# Altium PCB DiffProbe.PcbDoc
Units mm, origin at the board's own origin, x right, y up, seen from the top; angles counter-clockwise.
Board outline 23.11 x 12 mm, 4 copper layers (L1, L2, L3, L4), stack 1.627 mm thick; 27 components, 18 nets, 79 pads, 31 vias.
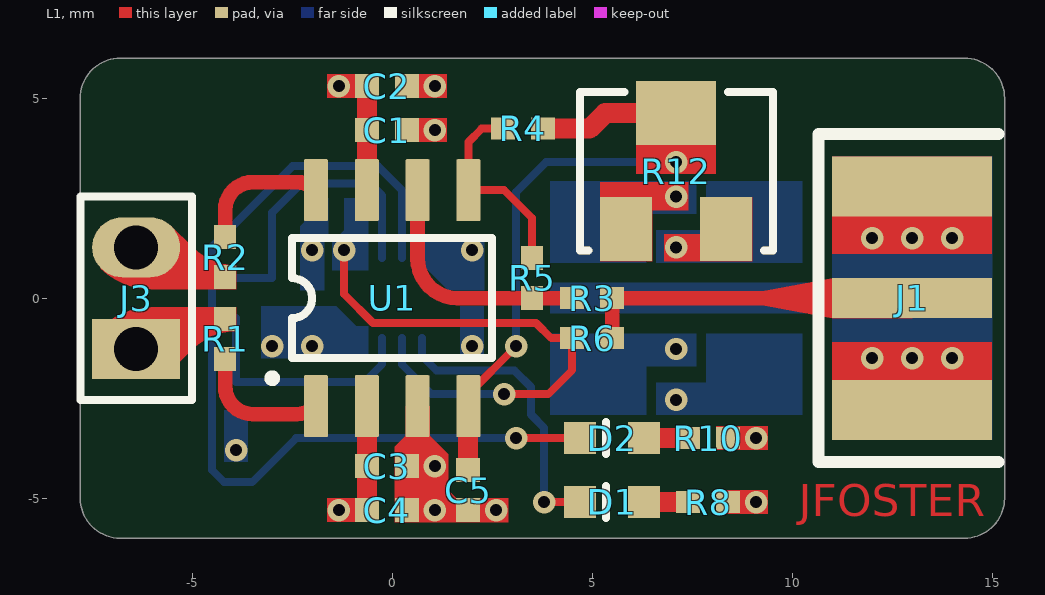
[diagram p0: L1 view]
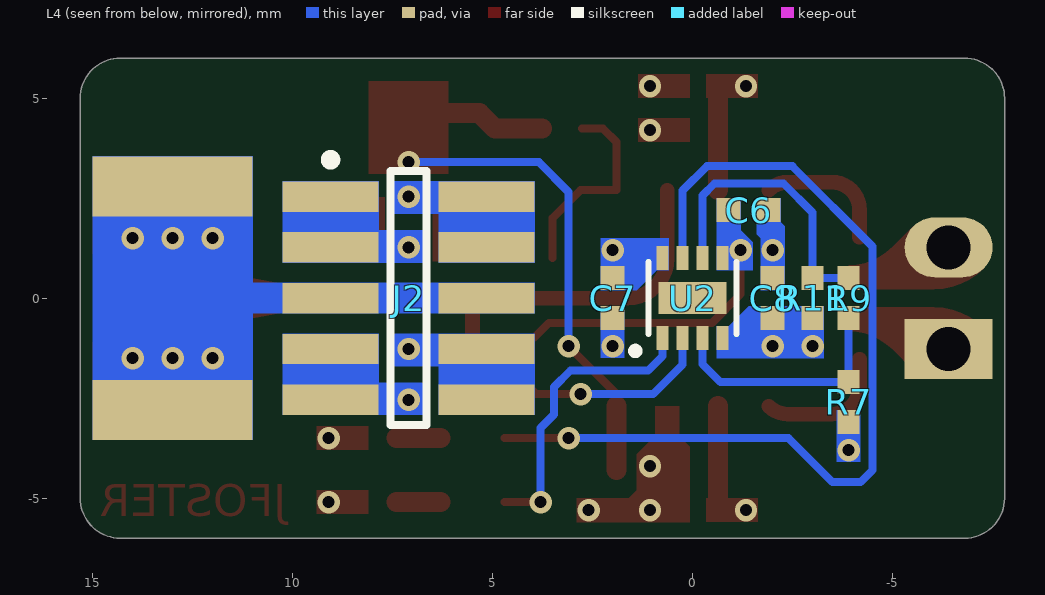
[diagram p1: L4 view, seen from below]
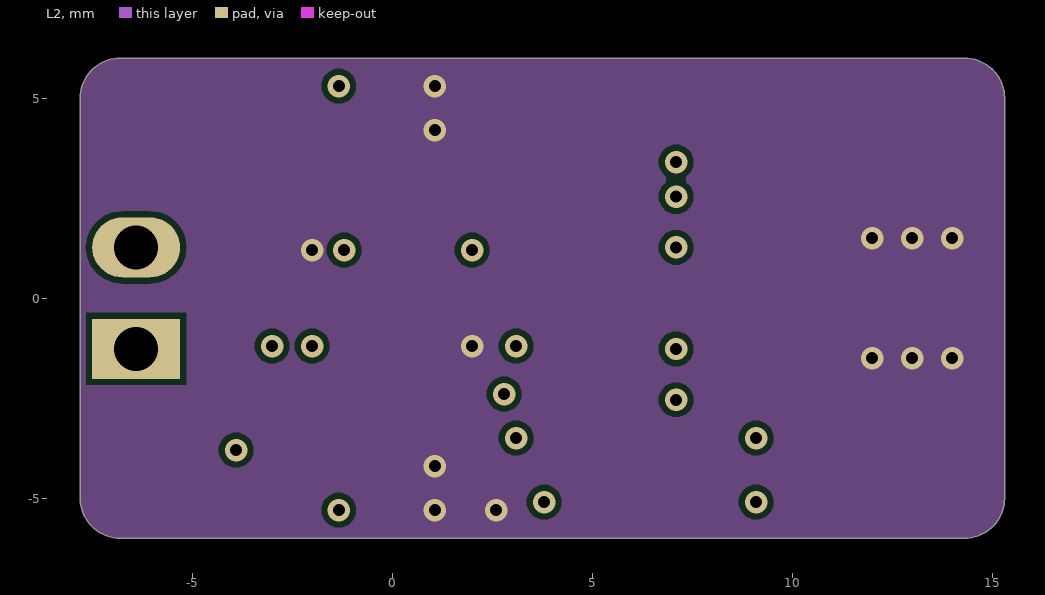
[diagram p2: L2]
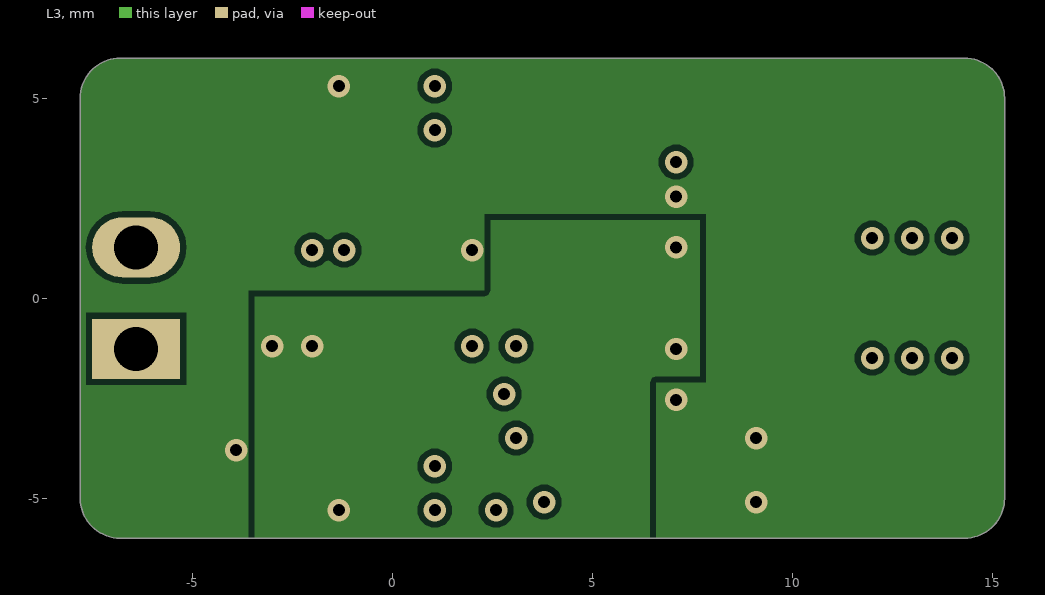
[diagram p3: L3]
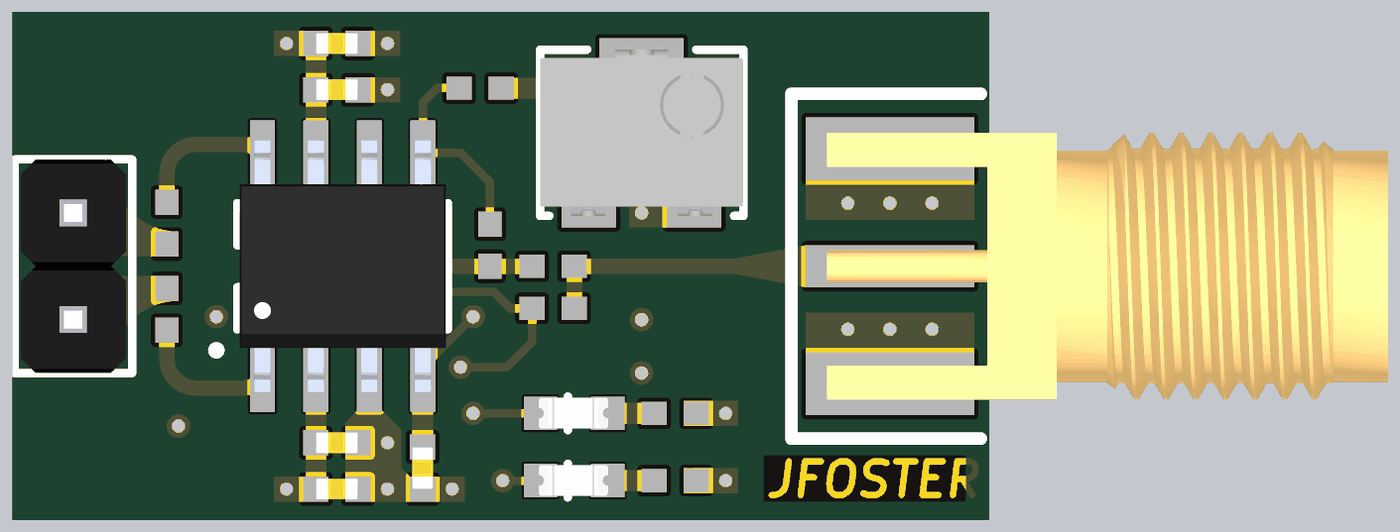
[diagram p4: 3D render of the assembled board from above, using the file's embedded part models]
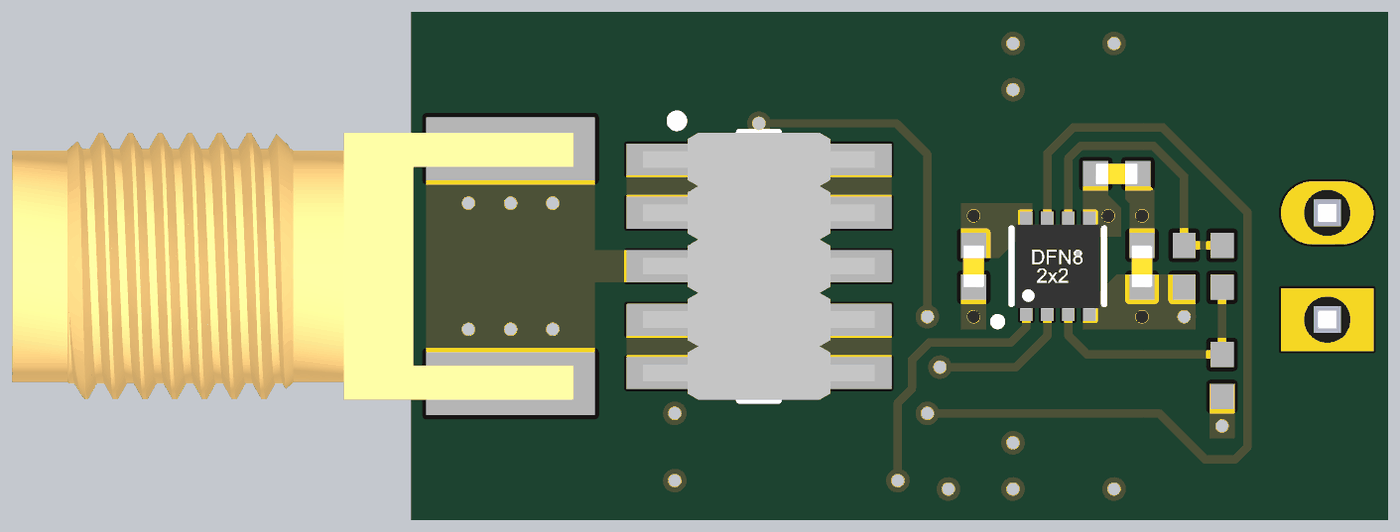
[diagram p5: 3D render of the assembled board from below, using the file's embedded part models]

## Layer stack, top to bottom
Top Solder: solder mask 0.0102, Solder Resist, Dk 3.5
L1: signal copper 0.035
D12: prepreg 0.2104, 7628*1, Dk 4.4
L2: signal copper 0.0356
D23: dielectric 1.065, FR-4, Dk 4.05
L3: signal copper 0.0356
D34: prepreg 0.2104, 7628*1, Dk 4.4
L4: signal copper 0.035
Bottom Solder: solder mask 0.0102, Solder Resist, Dk 3.5

## Board outline
-7.8,-5 -7.8,5 cw(c-6.8,5) -6.8,6 14.31,6 cw(c14.31,5) 15.31,5 15.31,-5 cw(c14.31,-5) 14.31,-6 -6.8,-6 cw(c-6.8,-5)

## Design rules (kind name [scope] priority, off if disabled: settings)
Clearance [All] p1: gap=0.15 ignorepadtopadclearanceinfootprint=FALSE except(0: Arc-Hole Track-Hole SMDPad-Hole THPad-Hole Via-Hole Fill-Hole Poly-Hole Region-Hole Text-Hole)
MinimumSolderMaskSliver [All] p1: minsoldermaskwidth=0
PolygonConnect [All] p1: thpad.connectstyle=Relief thpad.reliefconductorwidth=0.254 thpad.reliefentries=4 thpad.polygonreliefangle="90 Angle" thpad.airgapwidth=0.254 smdpad.connectstyle=Relief smdpad.reliefconductorwidth=0.254 smdpad.reliefentries=4 smdpad.polygonreliefangle="90 Angle" smdpad.airgapwidth=0.254 via.connectstyle=Direct via.reliefconductorwidth=0.254 via.reliefentries=4 via.polygonreliefangle="90 Angle" via.airgapwidth=0.254
RoutingVias [All] p1: holewidth=0.3 width=0.56 viastyle="Through Hole" minholewidth=0.3 minwidth=0.56 maxholewidth=0.3 maxwidth=0.56
SilkToSolderMaskClearance [IsPad] p1: minsilkscreentomaskgap=0 clearancetoexposedcopper=TRUE
SolderMaskExpansion SolderMaskExpansion_Via [IsVia] p1: expansion=0.102 istentingtop=TRUE
SolderMaskExpansion [All] p2: expansion=0.102 istentingtop=FALSE
Width Width_S50 [InNetClass('S50')] p1: maxlimit=0.369 minlimit=0.369 preferedwidth=0.369 toplayer_maxwidth=0.369 bottomlayer_maxwidth=0.369 impedanceprofiledriven=TRUE impedanceprofileid={E52D7031-FA7C-42DA-A5D1-F1E983051976} impedanceprofilevalue=50.000000 minimp=50.000000 maximp=50.000000 favimp=50.000000
Width [All] p2: maxlimit=2 minlimit=0.15 preferedwidth=0.2
28 further rules are at their usual default settings.

## Classes and differential pairs
net class S50: NetJ1_1 NetJ3_1 NetJ3_2 NetR1_2 NetR2_2 NetR3_1

## Components (designator, comment, footprint, x,y, rotation, side; value= is the part's Value field where it differs from the comment)
C1 "100pF" CAP,SMD,0402 -0.135,4.2 r180 top
C2 "100nF" CAP,SMD,0402 -0.135,5.3 r180 top
C3 "100pF" CAP,SMD,0402 -0.135,-4.2 r0 top locked
C4 "100nF" CAP,SMD,0402 -0.135,-5.3 r0 top locked
C5 "100nF" CAP,SMD,0402 1.9,-4.8 r90 top locked
C6 "100nF" CAP,SMD,0402 -1.4,2.2 r0 bottom locked
C7 "100nF" CAP,SMD,0402 2,0 r90 bottom locked
C8 "100nF" CAP,SMD,0402 -2,0 r90 bottom locked
D1 "Green" LED,0603 5.5,-5.1 r180 top
D2 "Red" LED,0603 5.5,-3.5 r180 top
J1 "CON-SMA-EDGE-S" CONN,SMA,50OHM,EDGE 10.56,0 r270 top locked
J2 "Term,Header,5x2 Pin,1.27mm,SMD" TERM,HEADER,5X2PIN,P1.27,SMD 7.1,0 r180 bottom locked
J3 "Term,Header,2 Pin,Top,2.54mm" TERM,HEADER,2PIN,2.54MM -6.4,0 r90 top locked
R1 "10R" RES,0402 -4.175,-1.025 r270 top
R2 "10R" RES,0402 -4.175,1.025 r90 top
R3 "49R9" RES,0402 5,0 r0 top locked
R4 "220R" RES,0402 3.266,4.237 r180 top
R5 "2k" RES,0402 3.5,0.5 r270 top
R6 "10k" RES,0402 5,-1 r180 top
R7 "10k" RES,0402 -3.9,-2.6 r270 bottom
R8 "1k" RES,0402 7.9,-5.1 r180 top
R9 "1k" RES,0402 -3.9,0 r270 bottom locked
R10 "1k" RES,0402 7.9,-3.5 r180 top
R11 "10k" RES,0402 -3,0 r90 bottom locked
R12 "2k" Res,Trim,5T,Top-Adj,SMD 7.1,3.175 r270 top
U1 "AD8129ARZ" IC,SOIC-8,1.27MM,W3.9 0,0 r90 top locked
U2 "LM2903Q2T" IC,DFN-8,P0.5,PAD 0,0 r180 bottom locked

## Footprints (in the part's own frame and the unit in brackets; to place one, negate y for a bottom-side part, rotate by r counter-clockwise, add the part's x,y. Pads: shape width x height; smd on the part's side, far side on the other; paste and mask are expansions set on the pad)
CAP,SMD,0402 [mm] "KEMET C0402C100K5GACTU"
  rect 0.6x0.6 smd: 1(-0.5,0) 2(0.5,0)
  body extent -0.5,-0.25 0.5,0.25, height 0.5
CONN,SMA,50OHM,EDGE [mm] "RF Solutions CON-SMA-EDGE-S"
  rect 1x4 smd: 1(0,2.44)
  rect 1.5x4 smd: 2(-2.795,2.44) 2(2.795,2.44)
  rect 1.5x4 smd far side: 2(-2.795,2.44) 2(2.795,2.44)
  silkscreen extent -4.1,0.1 4.1,4.6, body extent -3.18,0.94 3.17,14.27, height 3.55
IC,DFN-8,P0.5,PAD [mm] "ST Microelectronics LM2903Q2T"
  rect 0.3x0.6 smd mask+0.05: 1(-0.75,-1) 2(-0.25,-1) 3(0.25,-1) 4(0.75,-1) 5(0.75,1) 6(0.25,1) 7(-0.25,1) 8(-0.75,1)
  rect 1.7x0.8 smd mask+0.05: 9(0,0)
  silkscreen extent -1.49,-1.37 1.1,0.9, body extent -1,-1.01 1,1.01, height 1
IC,SOIC-8,1.27MM,W3.9 [mm] "Texas Instruments NE5532APSR"
  rrect10% 1.55x0.6 smd mask+0.05: 1(-2.7,1.905) 2(-2.7,0.635) 3(-2.7,-0.635) 4(-2.7,-1.905) 5(2.7,-1.905) 6(2.7,-0.635) 7(2.7,0.635) 8(2.7,1.905)
  silkscreen extent -2.07,-2.5 1.5,3.07, body extent -3,-2.45 3,2.45, height 1.5
LED,0603 [mm] "Stanley Electric Co THG1111C-0005-TR"
  rect 0.8x0.8 smd mask+0.05: 1(-0.8,0) 2(0.8,0)
  silkscreen extent 0.15,-0.4 0.15,0.4, body extent -0.81,-0.37 0.84,0.36, height 0.68
RES,0402 [mm] "Yageo RC0402FR-0722RL"
  rect 0.6x0.55 smd: 1(-0.5,0) 2(0.5,0)
  body extent -0.5,-0.25 0.5,0.25, height 0.35
Res,Trim,5T,Top-Adj,SMD [mm] "Bourns Inc. 3214W-1-202E"
  rect 1.6x1.3 smd: 1(1.45,1.25) 3(1.45,-1.25)
  rect 1.6x2 smd: 2(-1.45,0)
  silkscreen extent -1.98,-2.41 1.98,2.42, body extent -1.98,-2.41 1.98,2.42, height 5.29
TERM,HEADER,2PIN,2.54MM [mm] "Würth Elektronik 61300311121"
  rect 1.5x2.2 hole 1.1 mask+0.05: 1(-1.27,0)
  oval 1.5x2.2 hole 1.1 mask+0.05: 2(1.27,0)
  silkscreen extent -2.54,-1.4 2.54,1.4, body extent -2.54,-1.25 2.54,1.25, height 8.55
TERM,HEADER,5X2PIN,P1.27,SMD [mm] "Amphenol ICC (FCI) 20021121-00010C4LF"
  rect 2.4x0.76 smd mask+0.05: 1(-1.95,2.54) 2(1.95,2.54) 3(-1.95,1.27) 4(1.95,1.27) 5(-1.95,0) 6(1.95,0) 7(-1.95,-1.27) 8(1.95,-1.27) 9(-1.95,-2.54) 10(1.95,-2.54)
  silkscreen extent -2.07,-3.17 0.45,3.58, body extent -2.75,-3.18 2.75,3.18, height 4.5

## Part data
C1 C3: library part CAP,Cer,100pF,50VDC,C0G/NP0,0402, "100pF ±5% 50V Ceramic Capacitor C0G, NP0 0402 (1005 Metric)", Manufacturer="Murata Electronics", Manufacturer Part Number=GCM1555C1H101JA16D, Vendor Part Number=490-10669-1-ND, CreatedBy="Judd Foster", HelpURL=https://www.murata.com/~/media/webrenewal/support/library/catalog/products/capacitor/mlcc/c03e.ashx?la=en-us, Vendor=Digikey
C2 C4 C5 C6 C7 C8: library part CAP,Cer,100nF,25VDC,X7R,0402, "0.1µF ±10% 25V Ceramic Capacitor X7R 0402 (1005 Metric)", Manufacturer="Murata Electronics", Manufacturer Part Number=GRM155R71E104KE14J, Vendor Part Number=490-14603-1-ND, CreatedBy="Judd Foster", HelpURL=https://search.murata.co.jp/Ceramy/image/img/A01X/G101/ENG/GRM155R71E104KE14-01.pdf, Vendor=Digikey
D1: library part LED,Green,SMD,0603, "Green 530nm LED Indication - Discrete 3V 0603 (1608 Metric)", Manufacturer="Stanley Electric Co", Manufacturer Part Number=THG1111C-0005-TR, Vendor Part Number=404-1286-1-ND, CreatedBy="Judd Foster", HelpURL=http://www.stanley-components.com/php/downloaddatafile.php?rp=0,THG1111C-0005_e.pdf, Vendor=Digikey
D2: library part LED,Red,SMD,0603, "Red 633nm LED Indication - Discrete 2V 0603 (1608 Metric)", Manufacturer="Lite-On Inc.", Manufacturer Part Number="LS Q976-NR-1", Vendor Part Number=475-2512-1-ND, CreatedBy="Judd Foster", HelpURL=https://dammedia.osram.info/media/resource/hires/osram-dam-6494322/LS%20Q976_EN.pdf, Vendor=Digikey
J1: library part Conn,RF,SMA,Fem,50R,Edge,SMD, "SMA Connector Jack, Female Socket Board Edge, End Launch Solder", Manufacturer="RF Solutions", Vendor Part Number=CON-SMA-EDGE-S-ND, CreatedBy="Judd Foster", HelpURL=https://datasheet.lcsc.com/lcsc/2003251910_TE-Connectivity-5-1814832-2_C482015.pdf, Manufacturer Part Number=CON-SMA-EDGE-S, Vendor=DigiKey
J2: "Connector Header Surface Mount 10 position 0.050\" (1.27mm)", Manufacturer="Amphenol ICC (FCI)", Manufacturer Part Number=20021121-00010C4LF, Vendor Part Number=609-3695-1-ND, CreatedBy="Judd Foster", HelpURL=https://media.digikey.com/pdf/Data%20Sheets/FCI%20PDFs/Minitek%20127_Catalog.pdf, Vendor=Digikey
J3: "CONN HEADER VERT 2POS 2.54MM", Manufacturer=N/A, Created By="Judd Foster", HelpURL=N/A, Manufacturer Part Number=N/A, Vendor=N/A, Vendor Part Number=N/A
R1 R2: library part RES,10R,1%,0.063W,0402, "10 Ohms ±1% 0.063W, 1/16W Chip Resistor 0402 (1005 Metric) Automotive AEC-Q200 Thick Film", Manufacturer="Panasonic Electronic Components", Manufacturer Part Number=ERJ-2RKF10R0X, Vendor Part Number=P10.0LCT-ND, CreatedBy="Judd Foster", HelpURL=https://industrial.panasonic.com/cdbs/www-data/pdf/RDA0000/AOA0000C304.pdf, Vendor=Digikey
R3: library part RES,49R9,1%,0.063W,0402, "49.9 Ohms ±1% 0.063W, 1/16W Chip Resistor 0402 (1005 Metric) Moisture Resistant Thick Film", Manufacturer=Yageo, Manufacturer Part Number=RC0402FR-0749R9L, Vendor Part Number=311-49.9LRCT-ND, CreatedBy="Judd Foster", HelpURL=https://www.yageo.com/upload/media/product/productsearch/datasheet/rchip/PYu-RC_Group_51_RoHS_L_10.pdf, Vendor=Digikey
R4: library part RES,220R,1%,0.063W,0402, "220 Ohms ±1% 0.063W, 1/16W Chip Resistor 0402 (1005 Metric) Moisture Resistant Thick Film", Manufacturer=Yageo, Manufacturer Part Number=RC0402FR-07220RL, Vendor Part Number=311-220LRCT-ND, CreatedBy="Judd Foster", HelpURL=https://www.yageo.com/upload/media/product/productsearch/datasheet/rchip/PYu-RC_Group_51_RoHS_L_12.pdf, Vendor=Digikey
R5: library part RES,2k,1%,0.063W,0402, "2 kOhms ±1% 0.063W, 1/16W Chip Resistor 0402 (1005 Metric) Automotive AEC-Q200 Thick Film", Manufacturer="Stackpole Electronics Inc", Manufacturer Part Number=RMCF0402FT2K00, Vendor Part Number=RMCF0402FT2K00CT-ND, CreatedBy="Judd Foster", HelpURL=https://www.seielect.com/catalog/sei-rmcf_rmcp.pdf, Vendor=DIgikey
R6 R7 R11: library part RES,10k,5%,0.063W,0402, "10 kOhms ±5% 0.063W, 1/16W Chip Resistor 0402 (1005 Metric) Automotive AEC-Q200 Thick Film", Manufacturer="Stackpole Electronics Inc", Manufacturer Part Number=RMCF0402JT10K0, Vendor Part Number=RMCF0402JT10K0CT-ND, CreatedBy="Judd Foster", HelpURL=https://www.seielect.com/catalog/sei-rmcf_rmcp.pdf, Vendor=DIgikey
R8 R9 R10: library part RES,1k,5%,0.063W,0402, "1 kOhms ±5% 0.063W, 1/16W Chip Resistor 0402 (1005 Metric) Automotive AEC-Q200 Thick Film", Manufacturer="Stackpole Electronics Inc", Manufacturer Part Number=RMCF0402JT1K00, Vendor Part Number=RMCF0402JT1K00CT-ND, CreatedBy="Judd Foster", HelpURL=https://www.seielect.com/catalog/sei-rmcf_rmcp.pdf, Vendor=DIgikey
R12: library part RES,Trim,5T,2k,0.75W,Top-Adj,SMD, "0.25W, 1/4W J Lead Surface Mount Trimmer Potentiometer Cermet Turn Top Adjustment", Manufacturer="Bourns Inc.", Manufacturer Part Number=3214W-202ECT-ND, Vendor Part Number=3214W-1-202E, CreatedBy="Judd Foster", HelpURL=https://www.bourns.com/docs/Product-Datasheets/3214.pdf, Vendor=Digikey
U1: "Differential Amplifier 1 Circuit 8-SOIC", Manufacturer="Analog Devices Inc.", Vendor Part Number=505-AD8129ARZ-ND, CreatedBy="Judd Foster", HelpURL=https://www.analog.com/media/en/technical-documentation/data-sheets/AD8129_8130.pdf, Manufacturer Part Number=AD8129ARZ, Vendor=DigiKey
U2: "Comparator Differential CMOS, DTL, ECL, TTL 8-DFN (2x2)", Manufacturer=STMicroelectronics, Vendor Part Number=497-13503-1-ND, CreatedBy="Judd Foster", HelpURL=https://www.st.com/content/ccc/resource/technical/document/datasheet/44/f7/9d/99/42/20/45/fd/CD00000534.pdf/files/CD00000534.pdf/jcr:content/translations/en.CD00000534.pdf, Manufacturer Part Number=LM2903Q2T, Vendor=Digikey

## Via types
v1: diameter 0.56, hole 0.3, L1 to L4, tented both sides, 31 vias

## Nets (pads, with @x,y where several pads share a name; then routed paths per layer and width w, separated by ;. In a path a pad name is that pad's centre, name@x,y a point inside that pad or via, vN(x,y) a via of type N, cw(c..) or ccw(c..) an arc to the next point about the centre after c; other vN are vias at no path point)
GND: C1.1 C2.1 C3.2 C4.2 C5.1 C6.1 C7.1 C8.2 J1.2 J2.5 J2.6 U1.3
  other v1: 1.065,-5.3 2.6,-5.3 1.065,-4.2 12,-1.5 13,-1.5 14,-1.5 2,-1.2 -2,1.2 12,1.5 13,1.5 14,1.5 1.065,4.2 1.065,5.3
NetC5_2: C5.2 R4.1 R12.2 U1.4 | length 15.3
  L1 w0.2: U1.4 1.905,-2.395 v1(3.1,-1.2)
  L1 w0.5: C5.2 1.9,-2.705 U1.4 ; R4.1 4.937,4.237 5.325,4.625 R12.2
  L4 w0.2: v1(3.1,-1.2) 3.1,2.657 3.843,3.4 v1(7.1,3.4)
NetC6_2: C6.2 R6.2 U2.2 U2.5 | length 13.5
  L1 w0.2: v1(-1.2,1.2) -1.2,0.1 -0.482,-0.618 3.596,-0.618 3.978,-1 R6.2 4.5,-1.8 3.9,-2.4 v1(2.8,-2.4)
  L4 w0.2: U2.2 0.25,-1.663 0.987,-2.4 v1(2.8,-2.4)
NetD1_1: D1.1 R8.2 | length 1.1
  L1 w0.5: D1.1 R8.2
NetD1_2: D1.2 U2.1 | length 7.4
  L1 w0.2: v1(3.8,-5.1) D1.2
  L4 w0.2: U2.1 0.75,-1.449 1.113,-1.813 3.057,-1.813 3.467,-2.224 3.467,-2.91 3.8,-3.242 3.8,-3.75 v1(3.8,-5.1)
NetD2_1: D2.1 R10.2 | length 1.1
  L1 w0.5: D2.1 R10.2
NetD2_2: D2.2 U2.7 | length 22.9
  L1 w0.2: v1(3.1,-3.5) D2.2
  L4 w0.2: U2.7 0.25,2.693 -0.357,3.3 -2.492,3.3 -4.5,1.292 -4.5,-4.3 -4.2,-4.6 -3.5,-4.6 -2.4,-3.5 v1(3.1,-3.5)
NetJ1_1: J1.1 R3.2 R6.1 | length 8.5
  L1 w0.369: R6.1 R3.2 J1.1
NetJ3_1: J3.1 R1.1
NetJ3_2: J3.2 R2.1
NetR1_2: R1.2 U1.1 | length 3.4
  L1 w0.369: R1.2 -4.175,-2.206 ccw(c-3.481,-2.206) -3.481,-2.9 -2.388,-2.9 ccw(c-2.388,-2.217) U1.1
NetR2_2: R2.2 U1.8 | length 3.4
  L1 w0.369: R2.2 -4.175,2.206 cw(c-3.481,2.206) -3.481,2.9 -2.388,2.9 cw(c-2.388,2.217) U1.8
NetR3_1: R3.1 R5.2 U1.6 | length 6.1
  L1 w0.369: U1.6 0.635,1 ccw(c1.635,1) 1.635,0 R5.2 R3.1
NetR4_2: R4.2 R5.1 U1.5 | length 5.1
  L1 w0.2: R4.2 2.237,4.237 1.905,3.905 U1.5 2.8,2.7 3.5,2 R5.1
NetR7_1: R7.1 R9.2 U2.3 | length 6.1
  L4 w0.2: R9.2 R7.1 -0.7,-2.1 -0.25,-1.65 U2.3
NetR9_1: R9.1 R11.2 U2.6 | length 7.3
  L4 w0.2: R9.1 R11.2 -3,1.289 -3,2.139 -2.277,2.862 -0.543,2.862 -0.25,2.569 U2.6
VCC: C1.2 C2.2 C7.2 J2.2 J2.4 J2.7 J2.9 R7.2 R8.1 R10.1 R12.3 U1.7 U2.8 | length 2.6
  L1 w0.5: U1.7 C2.2
  other v1: 9.1,-5.1 -3.9,-3.8 9.1,-3.5 7.1,-2.54 2,1.2 7.1,2.54 -1.335,5.3
VEE: C3.1 C4.1 C8.1 J2.1 J2.3 J2.8 J2.10 R11.1 R12.1 U1.2 U2.4 | length 2.6
  L1 w0.5: C4.1 C3.1 U1.2
  other v1: -1.335,-5.3 7.1,-1.27 -3,-1.2 -2,-1.2 7.1,1.27
pads on no net: U2.9

## Polygon pours and split planes (outlines as drawn)
VEE on L3 "NONET_L-01_P-001" (solid, pour order 2): 7.85,-2.11 6.6,-2.11 6.6,-6 -3.6,-6 -3.6,0.2 2.3,0.2 2.3,2.11 7.85,2.11
VCC on L3 "NONET_L-01_P-001" (solid, pour order 1): -6.8,-6 cw(c-6.8,-5) -7.8,-5 -7.8,5 cw(c-6.8,5) -6.8,6 14.31,6 cw(c14.31,5) 15.31,5 15.31,-5 cw(c14.31,-5) 14.31,-6 6.6,-6 6.6,-2.11 7.85,-2.11 7.85,2.11 2.3,2.11 2.3,0.2 -3.6,0.2 -3.6,-6
GND on L2 "NONET_L-01_P-001" (solid, pour order 0): -7.8,-5 -7.8,5 cw(c-6.8,5) -6.8,6 14.31,6 cw(c14.31,5) 15.31,5 15.31,-5 cw(c14.31,-5) 14.31,-6 -6.8,-6 cw(c-6.8,-5)

## Other copper
L1:
  rectangle net NetC5_2: 6.1,3.1 8.1,5.425
  region net VCC: -1.635,5.6 -1.635,5 -0.335,5 -0.335,5.6
  rectangle net GND: 11,-3.545 15,-1.1
  rectangle net GND: 11,1.1 15,3.545
  region net VCC: 9.4,-5.4 9.4,-4.8 8.1,-4.8 8.1,-5.4
  region net VCC: 9.4,-3.8 9.4,-3.2 8.1,-3.2 8.1,-3.8
  region net VEE: -0.335,-5.6 -0.335,-5 -1.635,-5 -1.635,-5.6
  region net GND: 0.065,5.6 0.065,5 1.365,5 1.365,5.6
  region net GND: 0.065,4.5 0.065,3.9 1.365,3.9 1.365,4.5
  region net NetJ1_1: 11,-0.5 13,-0.5 13,0.5 11,0.5 9.25,0.172 9.25,-0.172
  region net NetJ3_2: -3.9,0.225 -3.9,0.825 cw(c-3.9,2.381) -5,1.281 -5.52,1.8 -7.28,1.8 -7.28,0.74 ccw(c-6.038,1.982) -6.038,0.225
  region net VEE: 9,0.925 6.8,0.925 6.8,1.6 7.7,1.6 7.7,2.525 9,2.525
  region net VCC: 5.2,2.9 7.4,2.9 7.4,2.2 6.5,2.2 6.5,0.925 5.2,0.925
  region net NetJ3_1: -3.9,-0.225 -3.9,-0.825 ccw(c-3.9,-2.381) -5,-1.281 -5.52,-1.8 -7.28,-1.8 -7.28,-0.74 cw(c-6.038,-1.982) -6.038,-0.225
  region net GND: 0.935,-2.7 0.935,-3.435 1.4,-3.9 1.4,-4.8 1.6,-5 2.9,-5 2.9,-5.6 0.065,-5.6 0.065,-3.715 0.335,-3.445 0.335,-2.7
  text "JFOSTER" at 10.164,-5.45 h0.8
L4:
  region net VCC: -3.6,-2.8 -4.2,-2.8 -4.2,-4.1 -3.6,-4.1
  region net GND: 2.3,-0.2 1.7,-0.2 1.7,-1.5 2.3,-1.5
  region net GND: -1.7,0.2 -1.7,1.5 -1.6,1.6 -1.6,2.5 -2.2,2.5 -2.2,1.9 -2.3,1.8 -2.3,0.2
  region net NetC6_2: -0.6,0.7 -0.6,2.5 -1.2,2.5 -1.2,1.7 -1.5,1.4 -1.5,0.7
  region net GND: 15,3.545 11,3.545 11,0.38 3.95,0.38 3.95,-0.38 11,-0.38 11,-3.545 15,-3.545
  region net VCC: 6.35,0.89 6.35,2.11 7.6,2.11 7.6,2.92 3.95,2.92 3.95,0.89
  region net VEE: 7.85,2.92 7.85,1.7 6.6,1.7 6.6,0.89 10.25,0.89 10.25,2.92
  region net VCC: 7.85,-0.89 7.85,-2.11 6.6,-2.11 6.6,-2.92 10.25,-2.92 10.25,-0.89
  region net VEE: 6.35,-2.92 6.35,-1.7 7.6,-1.7 7.6,-0.89 3.95,-0.89 3.95,-2.92
  region net VCC: 0.9,0.7 1.4,0.2 2.3,0.2 2.3,1.5 0.6,1.5 0.6,0.7
  region net VEE: -0.6,-0.7 -0.9,-0.7 -1.4,-0.2 -3.275,-0.2 -3.275,-1.5 -0.6,-1.5

## Silkscreen, mask and mechanical layers (free items; w line width, h text height)
Top Solder:
  rectangle: 10,-5.6 14.8,-4.5
Board Shape:
  the board outline again, w0.1

## Dimensions
14.31,-6 to 14.31,6 on Dimensions
-7.8,-5 to 15.31,-5 on Dimensions

## Text inside footprints (layer, text, board x,y; h text height)
J1: Mechanical 7 "PCB Edge" at 15.743,3.297 h1 r270